# Altium PCB 175-00023, rev3, PCB, Sinistro Pwr Supply.PcbDoc (part 2 of 2)
Units mil, origin at the board's own origin, x right, y up, seen from the top; angles counter-clockwise.
Board outline 8267.72 x 3937.01 mil, 5 copper layers (TopLayer (*.GTL), MidLayer1 (*.G1), AGND (*.GP1), GND (*.GP2), BottomLayer (*GBL)); 101 components, 68 nets, 420 pads, 79 vias.
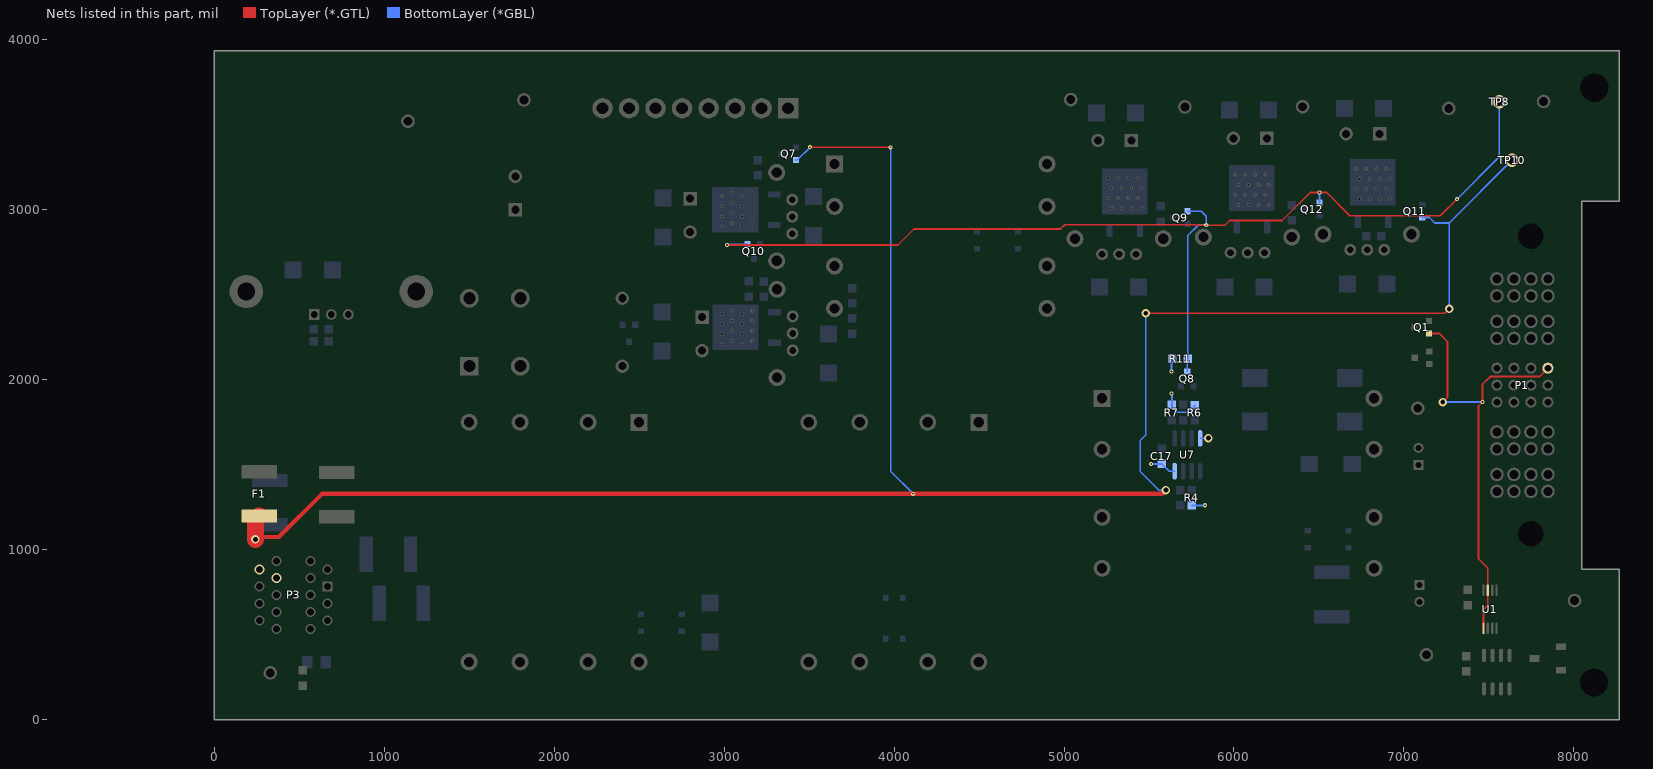
[diagram p5: the nets of this part, all layers, seen from the top]

## Via types
v1: diameter 50, hole 28, TopLayer (*.GTL) to BottomLayer (*GBL), 41 vias
v2: diameter 24, hole 10, TopLayer (*.GTL) to BottomLayer (*GBL), 38 vias

## Nets (pads, with @x,y where several pads share a name; then routed paths per layer and width w, separated by ;. In a path a pad name is that pad's centre, name@x,y a point inside that pad or via, vN(x,y) a via of type N, cw(c..) or ccw(c..) an arc to the next point about the centre after c; other vN are vias at no path point) (continued)
VCC: C17.2 F1.2 P3.5 P3.15 Q7.2 Q11.2 R4.1 R6.1 R7.2 R11.2 TP10.1 U7.4 U7.8 | length 13057.4
  TopLayer (*.GTL) w10: v2(3506,3369) 3979,3369 v2(3980,3368) ; v1(5481,2391) 7240,2391 v1(7266,2417)
  TopLayer (*.GTL) w25: v1(243,1061) 257,1075 379.92,1075 633.92,1329 v2(4112,1329) 5578,1329 v1(5600,1351)
  TopLayer (*.GTL) w100: v1(243,1061) 242,1061 242,1177.08 F1.2@264,1199.08
  BottomLayer (*GBL) w10: Q7.2@3423,3293 3430,3293 v2(3506,3369) ; v2(3980,3368) 3980,1461 v2(4112,1329) ; v1(5481,2391) 5481,1675 5449,1643 5449,1461 5559,1351 v1(5600,1351) ; v2(5513,1505) C17.2@5576,1505 5618.46,1462.54 U7.8@5651,1462.54 ; v2(5632,1919) 5635,1916 R7.2@5635,1852 5635,1841 5666,1810 5747,1810 5768,1831 R6.1@5768,1851 ; v2(5632,2049) 5632,2119.31 R11.2@5637.69,2125 ; R4.1@5752,1261 5828,1261 v2(5829,1262) ; U7.4@5801,1655.46 5848.46,1655.46 v1(5850,1657) ; Q11.2@7108,2955 7150,2955 7182,2923 7266,2923 ; v1(7266,2417) 7266,2923 ; TP10.1@7635,3292 7266,2923
~CS_SLOT: P1.9 Q1.1 U1.1 U1.7 | length 2628.4
  TopLayer (*.GTL) w10: Q1.1@7149.3,2273 7207.3,2273 7256,2224.3 7256,1896.7 v1@7230.3,1871 ; U1.1@7467.91,537.8 7467.91,647.61 7493.5,673.2 U1.7@7493.5,762.2 7493.5,892.8 7438.3,948 7438.3,1846.3 v2(7462,1870) 7462,1974 7507,2019 7797.35,2019 P1.9@7846.85,2068.5
  BottomLayer (*GBL) w10: v1(7228.3,1869) 7461,1869 v2(7462,1870)
~SPLY_DLY: Q8.3 Q9.1 Q10.1 Q12.1 R11.1 TP8.1 | length 6493.3
  TopLayer (*.GTL) w10: v2(3017,2793) 4023,2793 4117,2887 4978.89,2887 5004.89,2913 5776,2913 5778.89,2910.11 v2(5837,2910.11) 5947.11,2910.11 5974,2937 6283,2937 6448,3102 v2(6503,3102) 6545,3102 6682,2965 7214,2965 v2(7312,3063)
  BottomLayer (*GBL) w10: v2(3017,2793) 3022,2798 Q10.1@3138,2798 ; Q8.3@5725,2048 5725,2122.31 R11.1@5727.69,2125 5727.69,2848.69 5789.11,2910.11 v2(5837,2910.11) 5837,2963 5808,2992 Q9.1@5727.11,2992 ; Q12.1@6503,3042 v2(6503,3102) ; v2(7312,3063) 7561,3312 TP8.1@7561,3636
pads on no net: D3.2 P1.0 P1.1 P1.3 P1.4 P1.7 P1.8 U4.0 U5.0 U6.0 U7.5 U8.0 U9.0
copper on no net: | length 412.4
  TopLayer (*.GTL) w7: v2(6024.3,3733) v2@6028.35,3728.95
  BottomLayer (*GBL) w10: 6492,365 ccw(c6427.27,365) 6492,365

## Polygon pours and split planes (outlines as drawn)
VCC on AGND (*.GP1) (split plane): 5977.45,1202.55 5457.54,1202.55 5452.56,2472.45 5977.45,2472.45
NetF3_1 on AGND (*.GP1) (split plane): 3226.9,2839.57 3226.92,2839.47 3226.91,2839.36 3227.12,2838.5 3227.29,2837.62 3227.35,2837.53 3227.38,2837.43 3227.9,2836.71 3228.4,2835.97 3228.48,2835.91 3228.55,2835.82 3269.9,2797.76 3269.9,2770.1 891.93,2770.1 889.98,2769.71 888.32,2768.6 887.22,2766.95 886.83,2765 886.83,1267.1 555.1,1267.1 555.1,2994.9 2949.97,2994.9 2950.98,2995.1 2951.91,2995.29 2951.92,2995.29 2952.79,2995.87 2953.57,2996.39 2953.57,2996.4 2954.09,2997.17 2954.67,2998.05 2954.68,2998.05 2954.86,2998.99 2955.06,3000 2955.13,3143.01 2955.12,3143.05 3226.9,3144.87
NetF4_1 on AGND (*.GP1) (split plane): 3364.91,406.68 3363.65,405.04 3362.65,402.61 3362.3,400 3362.3,210.09 1056.74,210.09 1054.13,209.74 1051.7,208.74 1049.61,207.13 1048.01,205.04 1047,202.61 1046.65,200 1046.65,110.09 600.27,110.09 609.82,464.91 3079.86,464.91 3079.87,464.91 3081.1,465.08 3082.47,465.26 3082.48,465.26 3083.65,465.74 3084.91,466.26 3084.91,466.27 3086,467.11 3087,467.87 3087.8,468.92 3088.6,469.96 3089.1,471.16 3089.61,472.39 3089.77,473.66 3089.95,475 3089.84,734.34 3089.83,734.39 3089.84,734.44 3075.77,2000.11 3075.59,2001.36 3075.43,2002.61 3075.41,2002.66 3075.4,2002.72 3074.9,2003.88 3074.42,2005.04 3074.39,2005.09 3074.36,2005.14 3073.58,2006.13 3072.82,2007.13 3072.77,2007.17 3072.74,2007.21 3071.73,2007.96 3070.73,2008.73 3070.68,2008.76 3070.63,2008.79 3069.46,2009.26 3068.3,2009.74 3068.24,2009.75 3068.19,2009.77 3066.93,2009.92 3065.69,2010.09 2940.43,2010.09 2938.46,2489.91 3364.91,2489.91
NetF2_1 on AGND (*.GP1) (split plane): 5644.9,2924.67 5155.1,2924.67 5155.1,3175 5154.71,3176.95 5153.6,3178.6 5151.95,3179.71 5150,3180.1 425,3180.1 423.05,3179.71 421.4,3178.6 420.29,3176.95 419.9,3175 419.9,1267.1 130.1,1267.1 130.1,3319.9 5644.9,3319.9
A on AGND (*.GP1) (split plane): 8247.62,3071.28 8047.24,3071.28 8043.32,3070.89 8039.55,3069.75 8036.08,3067.89 8033.03,3065.39 8030.53,3062.35 8028.68,3058.87 8027.53,3055.1 8027.15,3051.18 8027.15,885.83 8027.53,881.91 8028.68,878.14 8030.53,874.66 8033.03,871.62 8036.08,869.12 8039.55,867.26 8043.32,866.12 8047.24,865.73 8247.62,865.73 8247.62,20.1 20.1,20.1 20.1,3916.91 8247.62,3916.91
NetFER3_1 on GND (*.GP2) (split plane): 6389.91,1790 6389.92,1789.94 6389.91,1789.88 6390.09,1788.63 6390.26,1787.39 6390.28,1787.33 6390.29,1787.27 6390.78,1786.12 6391.26,1784.96 6391.3,1784.91 6391.33,1784.85 6392.1,1783.86 6392.87,1782.87 6392.92,1782.83 6392.95,1782.78 6393.96,1782.03 6394.96,1781.27 6395.01,1781.24 6395.06,1781.2 6396.23,1780.74 6397.39,1780.26 6397.45,1780.25 6397.51,1780.23 6398.76,1780.08 6400,1779.91 6400.06,1779.92 6400.12,1779.91 7228.36,1789.91 8027.15,1789.91 8027.15,1270.8 7435.09,1260.27 7435.09,1575 7434.74,1577.61 7433.74,1580.04 7432.13,1582.13 7430.04,1583.73 7427.61,1584.74 7425,1585.09 5860.09,1585.09 5860.09,1880.91 6389.91,1880.91
NetFER3_2 on GND (*.GP2) (split plane): 8027.15,2660.12 8027.15,1810.09 7228.3,1810.09 7228.24,1810.08 7228.18,1810.09 6410.09,1800.21 6410.09,1891 6409.74,1893.61 6408.74,1896.04 6407.13,1898.13 6405.04,1899.73 6402.61,1900.74 6400,1901.09 5859.99,1901.09 5857.57,2149.91 7450,2149.91 7452.61,2150.26 7455.04,2151.27 7457.13,2152.87 7458.74,2154.96 7459.74,2157.39 7460.09,2160 7460.09,2669.74
NetF6_1 on GND (*.GP2) (split plane): 7139.91,2383.09 5377.45,2383.09 5374.84,2382.74 5372.41,2381.73 5370.32,2380.13 5368.71,2378.04 5367.71,2375.61 5367.36,2373 5367.36,510.09 1116.54,510.83 1121.34,838.88 1393.79,837.45 1441.01,744.43 1441.16,744.21 1441.27,743.95 1441.9,743.12 1442.49,742.26 1442.7,742.08 1442.87,741.87 1443.7,741.23 1444.49,740.55 1444.74,740.43 1444.96,740.26 1445.93,739.86 1446.87,739.41 1447.14,739.36 1447.39,739.26 1448.43,739.12 1449.46,738.93 1449.73,738.95 1450,738.91 5125,739.91 5126.29,740.08 5127.59,740.25 5127.6,740.26 5127.61,740.26 5128.81,740.75 5130.03,741.25 5130.03,741.26 5130.05,741.27 5131.09,742.07 5132.12,742.85 5132.12,742.86 5132.13,742.87 5132.92,743.9 5133.72,744.94 5133.73,744.95 5133.74,744.96 5134.22,746.13 5134.74,747.37 5134.74,747.38 5134.74,747.39 5134.91,748.67 5135.09,749.98 5138.84,2628.55 6499.94,2624.86 6500.02,2624.87 6500.1,2624.86 6501.33,2625.04 6502.56,2625.2 6502.63,2625.23 6502.7,2625.24 6503.85,2625.73 6504.99,2626.2 6505.05,2626.24 6505.12,2626.27 6506.1,2627.04 6507.08,2627.79 6507.13,2627.86 6507.19,2627.9 6507.93,2628.9 6508.69,2629.88 6508.72,2629.95 6508.77,2630.01 6509.23,2631.17 6509.71,2632.31 6509.72,2632.39 6509.75,2632.46 6509.89,2633.69 6510.06,2634.92 6510.05,2634.99 6510.06,2635.07 6501.42,3333.32 6502.7,3334.06 7139.91,3334.06
NetF5_1 on GND (*.GP2) (split plane): 6482,3342.87 6481.52,3341.71 6481.51,3341.65 6481.49,3341.59 6481.34,3340.35 6481.18,3339.1 6481.19,3339.04 6481.18,3338.97 6489.76,2645.06 5128.8,2648.75 5127.48,2648.58 5126.19,2648.42 5126.19,2648.41 5125,2647.93 5123.76,2647.42 5123.75,2647.41 5122.73,2646.63 5121.66,2645.82 5121.66,2645.81 5120.84,2644.75 5120.06,2643.73 5120.05,2643.73 5119.54,2642.49 5119.04,2641.3 5118.86,2639.99 5118.69,2638.69 5114.93,760.08 1456.19,759.09 1408.99,852.07 1408.85,852.27 1408.76,852.5 1408.11,853.35 1407.51,854.24 1407.32,854.4 1407.17,854.59 1406.32,855.25 1405.51,855.95 1405.28,856.06 1405.09,856.21 1404.1,856.62 1403.13,857.09 1402.89,857.13 1402.66,857.23 1401.6,857.37 1400.54,857.57 1400.3,857.55 1400.05,857.59 1121.49,859.05 1121.53,1102.11 4825,1102.11 4827.61,1102.45 4830.04,1103.46 4832.13,1105.06 4833.74,1107.15 4834.74,1109.59 4835.09,1112.2 4835.09,2815.91 5925,2815.91 5927.61,2816.26 5930.04,2817.27 5932.13,2818.87 5933.74,2820.96 5934.74,2823.39 5935.09,2826 5935.09,3342.81 6482.36,3343.77
NetC21_1 on GND (*.GP2) (split plane): 1885.75,2271.93 849.93,2254.01 848.4,2253.68 847.11,2252.79 846.96,2252.55 753.01,2252.55 753.01,2537.45 843.44,2537.45 843.74,2535.91 844.61,2534.61 845.91,2533.74 847.45,2533.44 1675.11,2533.44 1676.64,2533.74 1677.94,2534.61 1678.81,2535.91 1679.12,2537.45 1679.12,3104.3 1885.75,3104.3
NetC23_pos on GND (*.GP2) (split plane): 744.99,2252.55 356.3,2252.55 355.32,2252.36 354.5,2251.8 353.94,2250.98 353.75,2250 353.75,1319.08 174.43,1318.11 184.15,2537.45 744.99,2537.45
GND on GND (*.GP2) (split plane): 8247.62,3071.28 8047.24,3071.28 8043.32,3070.89 8039.55,3069.75 8036.08,3067.89 8033.03,3065.39 8030.53,3062.35 8028.68,3058.87 8027.53,3055.1 8027.15,3051.18 8027.15,2680.3 7450.17,2690.08 7450.09,2690.07 7450,2690.09 7448.78,2689.93 7447.56,2689.79 7447.47,2689.75 7447.39,2689.74 7446.25,2689.27 7445.11,2688.82 7445.04,2688.77 7444.96,2688.73 7443.98,2687.98 7442.99,2687.25 7442.94,2687.18 7442.87,2687.13 7442.12,2686.15 7441.35,2685.19 7441.32,2685.11 7441.26,2685.04 7440.79,2683.9 7440.3,2682.78 7440.29,2682.69 7440.26,2682.61 7440.1,2681.39 7439.92,2680.17 7439.92,2680.09 7439.91,2680 7439.91,2170.09 5847.39,2170.09 5847.34,2170.08 5847.29,2170.09 5846.04,2169.91 5844.78,2169.74 5844.73,2169.72 5844.68,2169.72 5843.52,2169.22 5842.35,2168.73 5842.31,2168.7 5842.26,2168.69 5841.26,2167.9 5840.26,2167.13 5840.23,2167.09 5840.19,2167.06 5839.42,2166.05 5838.65,2165.04 5838.64,2165 5838.61,2164.96 5838.13,2163.78 5837.65,2162.61 5837.64,2162.56 5837.62,2162.52 5837.47,2161.26 5837.3,2160 5837.31,2159.95 5837.3,2159.9 5839.91,1890.95 5839.91,1575 5840.26,1572.39 5841.26,1569.96 5842.87,1567.87 5844.96,1566.27 5847.39,1565.26 5850,1564.91 7414.91,1564.91 7414.91,1250 7414.93,1249.91 7414.92,1249.82 7415.1,1248.61 7415.26,1247.39 7415.29,1247.31 7415.31,1247.22 7415.79,1246.09 7416.26,1244.96 7416.32,1244.89 7416.36,1244.8 7417.12,1243.84 7417.87,1242.87 7417.94,1242.81 7418,1242.74 7418.98,1242.01 7419.96,1241.27 7420.04,1241.23 7420.11,1241.18 7421.25,1240.73 7422.39,1240.26 7422.48,1240.25 7422.56,1240.21 7423.78,1240.07 7425,1239.91 7425.09,1239.93 7425.18,1239.92 8027.15,1250.62 8027.15,885.83 8027.53,881.91 8028.68,878.14 8030.53,874.66 8033.03,871.62 8036.08,869.12 8039.55,867.26 8043.32,866.12 8047.24,865.73 8247.62,865.73 8247.62,20.1 20.1,20.1 20.1,3916.91 8247.62,3916.91
VCC on GND (*.GP2) (split plane): 353.75,1095.06 353.67,1095.01 353.11,1094.19 352.9,1093.21 350.79,912.32 350.79,912.31 350.79,912.29 350.88,911.82 350.97,911.34 350.98,911.33 350.98,911.32 351.25,910.91 351.51,910.51 351.53,910.5 351.53,910.49 379.5,882.53 380.32,881.98 381.3,881.78 463.75,881.78 463.75,786.88 338,786.88 288.75,836.13 287.92,836.69 286.94,836.88 168.85,836.88 168.85,934.24 169.8,934.42 170.64,934.96 171.2,935.79 171.4,936.76 174.35,1307.92 353.75,1308.89

## Keep-outs
KeepOutLayer:
  lines w8: -144.7,3790.26 8055.3,3790.26 ; -142.7,119 -142.7,319 -317.7,319 -317.7,3619 -142.7,3619 -142.7,3819 ; -141.7,107.74 7277.31,107.74 ; 8057.3,119 8057.3,319 8207.3,319 8207.3,3619 8057.3,3619 8057.3,3819

## Other copper
TopLayer (*.GTL):
  text "*.GTL - TOP LAYER GERBER DATA" at 2321.87,-1210.43 h80
MidLayer1 (*.G1):
  text "*.G1 --  MID LAYER GERBER DATA" at 2389,-1220 h80
BottomLayer (*GBL):
  text "c" at 6448,352 h60
  text "2013, Las Cumbres Observatory" at 6320,331 h60
  text "175-00023, Rev3, SINISTRO PWR SUPPLY" at 6443,182 h60
  text "*.GBL - BOTTOM LAYER GERBER DATA" at 2321.87,-1210.43 h80
AGND (*.GP1) (plane layer: these items are gaps in the copper):
  lines w5: 5450,2475 5980,2475 5980,1200 5455,1200 5450,2475
  lines w10: 2950,3148.11 3232,3150 3232,2839.57 3275,2800 3275,2765 2700,2765 891.93,2765 891.93,1262 550,1262 550,3000 700,3000 2750,3000 2949.97,3000 2950.03,3143.01 ; 125,1262 425,1262 425,3175 5150,3175 5150,2919.57 5650,2919.57 5650,3325 125,3325 125,1262
  lines w20: 781.74,475 600,475 ; 3372.39,400 3372.39,200 1056.74,200 1056.74,100 589.91,100 600,475 ; 3375,400 3375,2500 2928.33,2500 2930.39,2000 3065.69,2000 3079.75,734.33 3079.86,475 600,475
  text "*.GP1 - INTERNAL PLANE LAYER 1 GERBER DATA" at 2321.87,-1210.43 h80
GND (*.GP2) (plane layer: these items are gaps in the copper):
  lines w5: 166.3,939.33 166.3,834.33 286.94,834.33 336.94,784.33 466.3,784.33 466.3,884.33 381.3,884.33 353.34,912.29 355.45,1093.18 ; 168.85,936.78 181.62,2540 850,2540 ; 356.3,1093.5 356.3,2250 850,2250 ; 7959.69,1287 7960.3,1286.4
  lines w7.87: 749,2250 749,2540 ; 847.45,2537.45 1675.11,2537.45 1675.11,3108.32 1889.76,3108.32 1889.76,2267.99 850,2250
  lines w10: 171.84,1313 356.3,1314
  lines w20: 1106.3,500 1111.4,849.02 ; 1110.65,500.75 5377.45,500 5377.45,2373 7150,2373 7150,3344.14 6500,3344.14 6491.26,3339.1 6499.97,2634.95 5128.78,2638.67 5125,750 1450,749 1400,847.5 1111.4,849.02 ; 6497.39,3353.88 5925,3352.88 5925,2826 4825,2826 4825,1112.2 4750,1112.2 1111.45,1112.2 1111.4,849.02 ; 8036.08,1800 7228.3,1800 6400,1790 6400,1891 5850,1891 ; 8039.55,2670 7450,2680 7450,2160 5847.39,2160 5850,1891 ; 8043.32,1261 7425,1250 7425,1575 5850,1575 5850,1891
  text "*.GP2 - INTERNAL PLANE LAYER 2 GERBER DATA" at 2317.91,-1230.32 h80

## Silkscreen, mask and mechanical layers (free items; w line width, h text height)
TopOverlay:
  rectangle: 1429,3580 1686,3764
  rectangle: 2257,-354 2300,-346
  lines w10: -593.7,0 -593.7,3937.01 -493.7,3937.01 -493.7,0 -593.7,0
  lines w11.81: 1525,3000 1715,3000 ; 1525,3200 1715,3200 ; 15,2855 1525,2855 1525,3100 1525,3345 15,3345 15,2855
  lines w19.68: 434,2269.68 0,2269.68 0,2769.68 1377.95,2769.68 1377.95,2269.68 944,2269.68
  text "780-00028" at 135.13,3744.53 h40
  text "-5V" at 1822,3734 h40
  text "+28V" at 4979,3725 h40
  text "AGND" at 7746,3712 h40
  text "FS12-500  (+/-5V)" at 3956,3703 h60
  text "+5V" at 5643,3668 h40
  text "-12V" at 7193,3667 h40
  text "+12V" at 6282,3666 h40
  text "SCH, SINISTRO POWER SUPPLY  REV:" at 153.83,3649.06 h40
  text "AGND" at 901,3499 h40
  text "VCC" at 7596,3366 h40
  text "A" at 7190,1584 h40
  text "GND" at 7184,1480 h40
  text "GND" at 7168,774 h40
  text "+24V" at 7946,769 h40
  text "24RTN" at 7154,673 h40
  text "AGND" at 7068,442 h40
  text "AGND" at 275,355 h40
  text "PGM" at 7862.2,192.91 h40
  text "FS24-800 (+/- 12V)" at 5413,171 h60
  text "FS12-1000  (Vcc)" at 1575,167 h60
  text "FS24-500  (+28V)" at 3482,167 h60
  text "*.GTO - TOP OVERLAY GERBER DATA" at 2321.87,-1210.43 h80
BottomOverlay:
  text "*GBO - BOTTOM OVERLAY GERBER DATA" at 2321.87,-1210.43 h80
TopPaste:
  text "*.GTP - TOP-SIDE SOLDER PASTE MASK" at 2321.86,-1210.43 h80
BottomPaste:
  text "*.GBP - BOTTOM-SIDE SOLDER PASTE MASK" at 2321.86,-1210.43 h80
TopSolder:
  text "*.GTS - TOP SOLDER MASK GERBER DATA" at 2321.87,-1210.43 h80
BottomSolder:
  rectangle: 4590,141 6502,452
  rectangle: 4286,143 4618,263
  text "*.GBS - BOTTOM SOLDER MASK GERBER DATA" at 2321.87,-1210.43 h80
Mechanical1:
  lines w39.37: 0,0 8267.72,0 8267.72,885.83 8047.24,885.83 8047.24,3051.18 8267.72,3051.18 8267.72,3937.01 0,3937.01 0,3346.46 0,629.92 0,0
Mechanical2:
  lines w10: -11591.27,-8447.2 9408.73,-8447.2 9408.73,7552.8 -11591.27,7552.8 -11591.27,-8447.2 ; 5353.73,-8341.2 ccw(c5403.73,-8341.2) 5403.73,-8391.2 5733.73,-8391.2 ccw(c5733.73,-8351.2) 5773.73,-8351.2 5773.73,-8181.2 ccw(c5733.73,-8181.2) 5733.73,-8141.2 5353.73,-8141.2 5353.73,-8341.2 ; 5353.73,-8051.2 ccw(c5403.73,-8051.2) 5403.73,-8101.2 9303.73,-8101.2 ccw(c9303.73,-8051.2) 9353.73,-8051.2 9353.73,-7861.2 ccw(c9303.73,-7861.2) 9303.73,-7811.2 5353.73,-7811.2 5353.73,-8051.2 ; 5353.73,-7721.2 ccw(c5403.73,-7721.2) 5403.73,-7771.2 7283.73,-7771.2 ccw(c7283.73,-7721.2) 7333.73,-7721.2 7333.73,-7571.2 ccw(c7283.73,-7571.2) 7283.73,-7521.2 5353.73,-7521.2 5353.73,-7721.2 ; 5353.73,-7441.2 ccw(c5393.73,-7441.2) 5393.73,-7481.2 6203.73,-7481.2 ccw(c6203.73,-7431.2) 6253.73,-7431.2 6253.73,-7281.2 ccw(c6203.73,-7281.2) 6203.73,-7231.2 5353.73,-7231.2 5353.73,-7441.2 ; 5813.73,-8351.2 ccw(c5853.73,-8351.2) 5853.73,-8391.2 7813.73,-8391.2 ccw(c7813.73,-8351.2) 7853.73,-8351.2 7853.73,-8181.2 ccw(c7813.73,-8181.2) 7813.73,-8141.2 5813.73,-8141.2 5813.73,-8351.2 ; 6293.73,-7431.2 ccw(c6343.73,-7431.2) 6343.73,-7481.2 7283.73,-7481.2 ccw(c7283.73,-7431.2) 7333.73,-7431.2 7333.73,-7281.2 ccw(c7283.73,-7281.2) 7283.73,-7231.2 6293.73,-7231.2 6293.73,-7431.2 ; 7373.73,-7721.2 ccw(c7423.73,-7721.2) 7423.73,-7771.2 9303.73,-7771.2 ccw(c9303.73,-7721.2) 9353.73,-7721.2 9353.73,-7571.2 ccw(c9303.73,-7571.2) 9303.73,-7521.2 7373.73,-7521.2 7373.73,-7721.2 ; 7373.73,-7431.2 ccw(c7423.73,-7431.2) 7423.73,-7481.2 8363.73,-7481.2 ccw(c8363.73,-7431.2) 8413.73,-7431.2 8413.73,-7281.2 ccw(c8363.73,-7281.2) 8363.73,-7231.2 7373.73,-7231.2 7373.73,-7431.2 ; 7893.73,-8341.2 ccw(c7943.73,-8341.2) 7943.73,-8391.2 8273.73,-8391.2 ccw(c8273.73,-8351.2) 8313.73,-8351.2 8313.73,-8181.2 ccw(c8273.73,-8181.2) 8273.73,-8141.2 7893.73,-8141.2 7893.73,-8341.2 ; 8353.73,-8351.2 ccw(c8393.73,-8351.2) 8393.73,-8391.2 9303.73,-8391.2 ccw(c9303.73,-8341.2) 9353.73,-8341.2 9353.73,-8191.2 ccw(c9303.73,-8191.2) 9303.73,-8141.2 8353.73,-8141.2 8353.73,-8351.2 ; 8453.73,-7431.2 ccw(c8503.73,-7431.2) 8503.73,-7481.2 9303.73,-7481.2 ccw(c9303.73,-7431.2) 9353.73,-7431.2 9353.73,-7281.2 ccw(c9303.73,-7281.2) 9303.73,-7231.2 8453.73,-7231.2 8453.73,-7431.2
  lines w17: -11187.05,-4047.46 -5889.72,-4047.46 ; -11187.05,-3743.46 -5889.72,-3743.46 ; -11247.05,-6405.94 ccw(c-11149.05,-6405.94) -11149.05,-6503.94 -5927.72,-6503.94 ccw(c-5927.72,-6405.94) -5829.72,-6405.94 -5829.72,-3174.77 ccw(c-5927.72,-3174.77) -5927.72,-3076.77 -11149.05,-3076.77 ccw(c-11149.05,-3174.77) -11247.05,-3174.77 -11247.05,-6405.94
  lines w20: -11571.2,-7801.33 cw(c-11521.27,-7876.2) -11521.27,-7786.2 -11061.27,-7786.2 cw(c-11061.27,-7876.2) -10971.27,-7876.2 -10971.27,-7926.2 ccw(c-10961.27,-7926.2) -10961.27,-7936.2 -8321.27,-7936.2 cw(c-8321.27,-8026.2) -8231.27,-8026.2 -8231.27,-8366.2 cw(c-8321.27,-8366.2) -8246.39,-8416.14 ; 5309.9,-8431.18 cw(c5403.73,-8341.2) 5273.73,-8341.2 5273.73,-6671.2 cw(c5403.73,-6671.2) 5403.73,-6541.2 9303.73,-6541.2 cw(c9303.73,-6671.2) 9392.39,-6576.13 ; -11571.27,-8366.2 ccw(c-11521.27,-8366.2) -11521.27,-8416.2 -8321.27,-8416.2 ccw(c-8321.27,-8366.2) -8271.27,-8366.2 -8271.27,-8026.2 ccw(c-8321.27,-8026.2) -8321.27,-7976.2 -10961.27,-7976.2 cw(c-10961.27,-7926.2) -11011.27,-7926.2 -11011.27,-7876.2 ccw(c-11061.27,-7876.2) -11061.27,-7826.2 -11521.27,-7826.2 ccw(c-11521.27,-7876.2) -11571.27,-7876.2 -11571.27,-8366.2 ; -4061.27,-8267.2 ccw(c-3931.27,-8267.2) -3931.27,-8397.2 808.73,-8397.2 ccw(c808.73,-8267.2) 938.73,-8267.2 938.73,-6677.2 ccw(c808.73,-6677.2) 808.73,-6547.2 -3931.27,-6547.2 ccw(c-3931.27,-6677.2) -4061.27,-6677.2 -4061.27,-8267.2 ; 5313.73,-8341.2 ccw(c5403.73,-8341.2) 5403.73,-8431.2 9303.73,-8431.2 ccw(c9303.73,-8341.2) 9393.73,-8341.2 9393.73,-6671.2 ccw(c9303.73,-6671.2) 9303.73,-6581.2 5403.73,-6581.2 ccw(c5403.73,-6671.2) 5313.73,-6671.2 5313.73,-8341.2
  lines w24: -1511.27,-8237.2 -1361.27,-8237.2 ; -1511.27,-7987.2 -1361.27,-7987.2 ; -1511.27,-7737.2 -1361.27,-7737.2 ; -1511.27,-7487.2 -1361.27,-7487.2 ; -1511.27,-7237.2 -1361.27,-7237.2
  lines w30: -12091.27,-8947.2 9908.73,-8947.2 9908.73,8052.8 -12091.27,8052.8 -12091.27,-8947.2
  lines w50: 5498.73,-7082.2 7148.73,-7082.2 ; 5498.73,-6702.2 7148.73,-6702.2 ; 7148.73,-7082.2 5488.73,-7082.2 5488.73,-6702.2 7148.73,-6702.2 ; 7148.73,-7082.2 7148.73,-6702.2
  text "NOTES (UNLESS OTHERWISE SPECIFIED):" at -11271.27,7028.8 h90
  text "GENERAL" at -11171.27,6828.8 h90
  text "1)" at -11071.27,6628.75 h75
  text "PCB IS 5-LAYER, .062\" THICK." at -10871.27,6628.76 h75
  text "2)" at -11071.27,6478.75 h75
  text "CONSTRUCTION IS SOLDER-MASK-OVER-BARE-COPPER (SMOBC)." at -10871.27,6478.75 h75
  text "3)" at -11071.27,6328.75 h75
  text "ACCEPTABILITY SHALL BE BASED ON IPC-A-600, CLASS 2." at -10871.27,6328.75 h75
  text "4)" at -11071.27,6178.75 h75
  text "THE FOLLOWING GERBER RS274X PHOTO TOOL FILES SHALL BE USED TO DEFINE ALL CIRCUIT FEATURES:" at -10871.27,6178.75 h75
  text "*.GTL - TOP LAYER GERBER DATA" at -10597.27,5967.79 h80
  text "*.G1 - MID LAYER 1 GERBER DATA" at -10597.27,5814.13 h80
  text "*.GP1 - INTERNAL PLANE LAYER 1 GERBER DATA" at -10597.27,5353.13 h80
  text "*.GP2 - INTERNAL PLANE LAYER 2 GERBER DATA" at -10597.27,5199.46 h80
  text "*.GBL - BOTTOM LAYER GERBER DATA" at -10597.27,4584.8 h80
  text "*.GTO - TOP OVERLAY GERBER DATA" at -10597.27,4431.13 h80
  text "*.GTS - TOP SOLDER MASK GERBER DATA" at -10597.27,4277.47 h80
  text "*.GTP - TOP-SIDE SOLDER PASTE MASK" at -10597.28,4123.79 h80
  text "*GBO - BOTTOM OVERLAY GERBER DATA" at -10597.27,3970.14 h80
  text "*.GBS - BOTTOM SOLDER MASK GERBER DATA" at -10597.27,3816.47 h80
  text "*.GBP - BOTTOM-SIDE SOLDER PASTE MASK" at -10597.28,3662.8 h80
  text "5)" at -11168.27,2947.03 h75
  text "THE PHOTO TOOL SHALL NOT BE COMPENSATED WITHOUT PRIOR ENGINEERING APPROVAL." at -10968.27,2947.03 h75
  text "PCB DESIGNER: RICH LOBDILL   PH (805) 880-1621  FAX (805) 961-1792." at -10968.27,2797.08 h75
  text "FABRICATION TOLERANCES" at -11113.27,2470.8 h90
  text "6)" at -11013.27,2270.75 h75
  text "END PRODUCT CONDUCTOR WIDTHS AND PAD DIAMETERS SHALL NOT VARY MORE THAN" at -10813.27,2270.75 h75
  text "0.002\" FROM THE 1:1 DIMENSIONS OF THE MASTER ARTWORK." at -10813.27,2120.8 h75
  text "7)" at -11013.27,1970.75 h75
  text "THE CONDUCTIVE PATTERN SHALL BE POSITIONED SO THAT THE LOCATION OF ANY PAD OR" at -10813.27,1970.75 h75
  text "LAND SHALL BE WITHIN 0.005\" DIAMETER TO THE TRUE POSITION OF THE HOLE IT CIRCUMSCRIBES." at -10813.27,1820.8 h75
  text "8)" at -11013.27,1670.75 h75
  text "ALL DRILL HOLE SIZES AND TOLERANCES APPLY AFTER PLATING." at -10813.27,1670.75 h75
  text "9)" at -11013.27,1520.75 h75
  text "THE MINIMUM ANNULAR RING SHALL BE 0.005\"." at -10813.27,1520.75 h75
  text "10)" at -11068.27,1370.75 h75
  text "BOW AND TWIST SHALL NOT EXCEED 0.010\" PER INCH." at -10813.27,1370.75 h75
  text "11)" at -11058.27,1220.75 h75
  text "FOR PCB ROUTING DIMENSIONS: .XXX = +/-.005\"  .XX = +/-.020\"" at -10813.27,1220.75 h75
  text "MATERIAL" at -11113.27,1020.8 h90
  text "12)" at -11068.27,820.75 h75
  text "BASE MATERIAL IS FR4 EPOXY FIBERGLASS" at -10806.27,814.8 h75
  text "SEE STACK-UP LEGEND FOR COPPER CLADDING CALL OUTS" at -10806.27,674.8 h75
  text "13)" at -11068.27,670.75 h75
  text "PLATING" at -11113.27,470.8 h90
  text "14)" at -11068.27,275.75 h75
  text "ALL HOLES AND CONDUCTIVE SURFACES SHALL BE PLATED WITH A MINIMUM OF 0.001\" COPPER." at -10813.27,275.75 h75
  text "15a)" at -11068.27,125.75 h75
  text "AFTER SOLDERMASK, ALL EXPOSED HOLES AND CONDUCTIVE SURFACES SHALL BE COATED" at -10813.27,125.75 h75
  text "WITH A GOLD IMMERSION PLATING TO PRESERVE SOLDERABILITY." at -10806.27,-25.2 h75
  text "15b)" at -11089.27,-186.25 h75
  text "COPPER THEVING ON LAYERS AS NEEDED" at -10807,-200 h75
  text "COATINGS" at -11117.27,-422.2 h90
  text "16)" at -11067.27,-617.25 h75
  text "THE SOLDERMASK SHALL BE BLACK LIQUID PHOTO-IMAGEABLE PER IPC-SM-840, TYPE-B, CLASS 2." at -10817.27,-617.25 h75
  text "17)" at -11072.27,-767.25 h75
  text "THE SOLDERMASK REGISTRATION ALLOWANCE IS 0.003\".  THERE SHALL BE NO SOLDERMASK ON" at -10817.27,-767.25 h75
  text "ANY SOLDER PAD OR LAND." at -10817.27,-917.25 h75
  text "MARKING" at -11117.27,-1117.2 h90
  text "18)" at -11072.27,-1312.25 h75
  text "THE LEGEND SHALL BE SCREEN-PRINTED USING PERMANENT YELLOW EPOXY INK." at -10817.27,-1312.25 h75
  text "19)" at -11072.27,-1462.25 h75
  text "THE SCREEN PRINTING REGISTRATION ALLOWANCE IS 0.007\".  THERE SHALL BE NO INK ON ANY" at -10817.27,-1462.25 h75
  text "SOLDER PAD OR LAND." at -10817.27,-1612.2 h75
  text "20)" at -11082.27,-1762.25 h75
  text "THE VENDOR CODE AND UL FLAMMABILITY RATING MAY BE ETCHED IN THE FOIL OR MARKED IN" at -10817.27,-1762.25 h75
  text "PERMANENT EPOXY INK (VENDOR'S OPTION)." at -10817.27,-1912.2 h75
  text "ELECTRICAL TESTING" at -11117.27,-2112.2 h90
  text "21)" at -11072.27,-2307.25 h75
  text "ALL BOARDS SHALL BE ELECTRICALLY TESTED TO THE SUPPLIED IPC-D-356A NET LIST" at -10817.27,-2307.25 h75
  text "FOR CONTINUITY, OPENS AND SHORTS." at -10817.27,-2457.2 h75
  text "Layer Stack Up Detail for: 175-00023, rev3, PCB, Sinistro Pwr Supply.PcbDoc" at -11187.05,-3457.62 h70
  text "Layer" at -11187.05,-3856.96 h70
  text "COPPER THICKNESS" at -8794.29,-3959.65 h100
  text "Name" at -11187.05,-3996.96 h70
  text "TopLayer (*.GTL)" at -11187.05,-4280.76 h98
  text "1/2 oz,  1 oz Finished" at -8927.22,-4303.09 h100
  text "MidLayer1 (*.G1)" at -11187.05,-4730.35 h98
  text "1 oz" at -8951.31,-4740.43 h100
  text "AGND (*.GP1)" at -11187.05,-5179.95 h98
  text "1 oz" at -8984.77,-5194.17 h100
  text "1 oz" at -8984.77,-5607.56 h100
  text "GND (*.GP2)" at -11187.05,-5629.54 h98
  text "BottomLayer (*GBL)" at -11187.05,-6079.14 h98
  text "1/2 oz,  1 oz Finished" at -9066.98,-6120.02 h100
  text "Las Cumbres Observatory, Inc." at 7318.73,-6722.2 h90
  text "Las Cumbres Observatory" at 5548.73,-6842.2 h150
  text "PRIMARY PCB SPECIFICATIONS" at -3614.27,-6857.2 h200
  text "6740 Cortona Dr." at 7758.73,-6876.2 h90
  text "Global Telescope Network" at 5708.73,-7002.2 h125
  text "Goleta, CA 93117" at 7708.73,-7026.2 h90
  text "(REFER TO COMPLETE SPEC LISTING AT LEFT FOR FURTHER DETAILS)" at -3961.27,-7062.2 h100
  text "www.lcogt.net" at 7848.73,-7172.2 h90
  text "DATE" at 5373.73,-7283 h32
  text "DESIGNED" at 6313.73,-7283 h32
  text "DRAWN" at 7393.73,-7283 h32
  text "SCALE" at 8473.73,-7283 h32
  text "NUMBER OF LAYERS" at -3861.27,-7312.2 h150
  text "5" at -311.27,-7312.22 h150
  text "Rich Lobdill" at 7698.73,-7382.2 h55
  text "Rich Lobdill" at 6573.73,-7387.2 h55
  text "1 : 1" at 8758.73,-7401.2 h90
  text "1/16/2013" at 5403.73,-7408.2 h90
  text "FINISHED THICKNESS" at -3861.27,-7562.2 h150
  text ".062\"" at -486.27,-7562.2 h150
  text "CHECKED/DATE" at 5373.73,-7573 h32
  text "APPROVED/DATE" at 7393.73,-7573 h32
  text "BASE MATERIAL" at -3861.27,-7812.2 h150
  text "FR4" at -561.27,-7812.2 h150
  text "TITLE" at 5373.73,-7863 h32
  text "NOTICE" at -11516.27,-7971.2 h100
  text "175-00023, SINISTRO POWER SUPPLY" at 5593.73,-8007.2 h100
  text "GOLD IMMERSION" at -1055.27,-8029.2 h150
  text "PLATING TYPE" at -3861.27,-8062.2 h150
  text "THIS DRAWING EMBODIES A PROPRIETARY DESIGN OWNED BY LAS CUMBRES" at -11481.27,-8086.2 h60
  text "OBSERVATORY.  IT IS SUBMITTED FOR A SPECIFIC PURPOSE UNDER A CON-" at -11481.27,-8186.2 h60
  text "SIZE" at 5373.73,-8193 h32
  text "DOC NO." at 5833.73,-8193 h32
  text "REV" at 7913.73,-8193 h32
  text "SHEET" at 8373.73,-8193 h32
  text "FIDENTIAL RELATIONSHIP, AND EXCEPT FOR PURPOSES EXPRESSLY GRANTED" at -11481.27,-8281.2 h60
  text "OF" at 8803.73,-8296.2 h60
  text "SOLDER MASK COLOR" at -3861.27,-8312.2 h150
  text "BLACK" at -436.27,-8312.2 h150
  text "1" at 8633.73,-8316.2 h100
  text "X" at 9033.73,-8316.2 h100
  text "3" at 8058.73,-8329.2 h130
  text "-" at 6388.73,-8331.2 h130
  text "GPT" at 7108.46,-8346 h130
  text "C" at 5508.73,-8347.2 h100
  text "IN WRITING, ALL RIGHTS ARE RESERVED BY LAS CUMBRES OBSERVATORY." at -11481.27,-8371.2 h60
Mechanical5:
  text "175-00023, Rev3, Sinistoro Power Supply" at 2342.9,-779.85 h80
  text "LAS CUMBRES OBSERVATORY   1/16/2013" at 2342.9,-929.87 h80
DrillDrawing:
  lines w10: -11591.27,-8447.2 9408.73,-8447.2 9408.73,7552.8 -11591.27,7552.8 -11591.27,-8447.2 ; 5353.73,-8341.2 ccw(c5403.73,-8341.2) 5403.73,-8391.2 5733.73,-8391.2 ccw(c5733.73,-8351.2) 5773.73,-8351.2 5773.73,-8181.2 ccw(c5733.73,-8181.2) 5733.73,-8141.2 5353.73,-8141.2 5353.73,-8341.2 ; 5353.73,-8051.2 ccw(c5403.73,-8051.2) 5403.73,-8101.2 9303.73,-8101.2 ccw(c9303.73,-8051.2) 9353.73,-8051.2 9353.73,-7861.2 ccw(c9303.73,-7861.2) 9303.73,-7811.2 5353.73,-7811.2 5353.73,-8051.2 ; 5353.73,-7731.2 ccw(c5393.73,-7731.2) 5393.73,-7771.2 6813.73,-7771.2 ccw(c6813.73,-7721.2) 6863.73,-7721.2 6863.73,-7571.2 ccw(c6813.73,-7571.2) 6813.73,-7521.2 5353.73,-7521.2 5353.73,-7731.2 ; 5813.73,-8351.2 ccw(c5853.73,-8351.2) 5853.73,-8391.2 7813.73,-8391.2 ccw(c7813.73,-8351.2) 7853.73,-8351.2 7853.73,-8181.2 ccw(c7813.73,-8181.2) 7813.73,-8141.2 5813.73,-8141.2 5813.73,-8351.2 ; 6903.73,-7721.2 ccw(c6953.73,-7721.2) 6953.73,-7771.2 8363.73,-7771.2 ccw(c8363.73,-7721.2) 8413.73,-7721.2 8413.73,-7571.2 ccw(c8363.73,-7571.2) 8363.73,-7521.2 6903.73,-7521.2 6903.73,-7721.2 ; 7893.73,-8341.2 ccw(c7943.73,-8341.2) 7943.73,-8391.2 8273.73,-8391.2 ccw(c8273.73,-8351.2) 8313.73,-8351.2 8313.73,-8181.2 ccw(c8273.73,-8181.2) 8273.73,-8141.2 7893.73,-8141.2 7893.73,-8341.2 ; 8353.73,-8351.2 ccw(c8393.73,-8351.2) 8393.73,-8391.2 9303.73,-8391.2 ccw(c9303.73,-8341.2) 9353.73,-8341.2 9353.73,-8191.2 ccw(c9303.73,-8191.2) 9303.73,-8141.2 8353.73,-8141.2 8353.73,-8351.2 ; 8453.73,-7721.2 ccw(c8503.73,-7721.2) 8503.73,-7771.2 9303.73,-7771.2 ccw(c9303.73,-7721.2) 9353.73,-7721.2 9353.73,-7571.2 ccw(c9303.73,-7571.2) 9303.73,-7521.2 8453.73,-7521.2 8453.73,-7721.2
  lines w20: -11566.2,-7816.33 cw(c-11516.27,-7891.2) -11516.27,-7801.2 -11056.27,-7801.2 cw(c-11056.27,-7891.2) -10966.27,-7891.2 -10966.27,-7941.2 ccw(c-10956.27,-7941.2) -10956.27,-7951.2 -8316.27,-7951.2 cw(c-8316.27,-8041.2) -8226.27,-8041.2 -8226.27,-8381.2 cw(c-8316.27,-8381.2) -8241.39,-8431.14 ; 5308.66,-8429.86 cw(c5403.73,-8341.2) 5273.73,-8341.2 5273.73,-7521.2 cw(c5353.73,-7521.2) 5353.73,-7441.2 9303.73,-7441.2 cw(c9303.73,-7571.2) 9392.39,-7476.13 ; -11566.27,-8381.2 ccw(c-11516.27,-8381.2) -11516.27,-8431.2 -8316.27,-8431.2 ccw(c-8316.27,-8381.2) -8266.27,-8381.2 -8266.27,-8041.2 ccw(c-8316.27,-8041.2) -8316.27,-7991.2 -10956.27,-7991.2 cw(c-10956.27,-7941.2) -11006.27,-7941.2 -11006.27,-7891.2 ccw(c-11056.27,-7891.2) -11056.27,-7841.2 -11516.27,-7841.2 ccw(c-11516.27,-7891.2) -11566.27,-7891.2 -11566.27,-8381.2 ; 5313.73,-8341.2 ccw(c5403.73,-8341.2) 5403.73,-8431.2 9303.73,-8431.2 ccw(c9303.73,-8341.2) 9393.73,-8341.2 9393.73,-7571.2 ccw(c9303.73,-7571.2) 9303.73,-7481.2 5353.73,-7481.2 ccw(c5353.73,-7521.2) 5313.73,-7521.2 5313.73,-8341.2
  lines w30: -12091.27,-8947.2 9908.73,-8947.2 9908.73,8052.8 -12091.27,8052.8 -12091.27,-8947.2
  text ".Legend" at -1117.27,-4330.2 h100
  text "DESIGNED" at 5373.73,-7573 h32
  text "DRAWN" at 6923.73,-7573 h32
  text "SCALE" at 8473.73,-7573 h32
  text "Rich Lobdill" at 5859.73,-7669.2 h55
  text "Rich Lobdill" at 7420.73,-7671.2 h55
  text "1 : 1" at 8758.73,-7691.2 h90
  text "TITLE" at 5373.73,-7863 h32
  text "NOTICE" at -11511.27,-7986.2 h100
  text "175-00023, SINISTRO POWER SUPPLY" at 5590.73,-8007.2 h100
  text "THIS DRAWING EMBODIES A PROPRIETARY DESIGN OWNED BY LAS CUMBRES" at -11476.27,-8101.2 h60
  text "SIZE" at 5373.73,-8193 h32
  text "DOC NO." at 5833.73,-8193 h32
  text "REV" at 7913.73,-8193 h32
  text "SHEET" at 8373.73,-8193 h32
  text "OBSERVATORY.  IT IS SUBMITTED FOR A SPECIFIC PURPOSE UNDER A CON-" at -11476.27,-8201.2 h60
  text "FIDENTIAL RELATIONSHIP, AND EXCEPT FOR PURPOSES EXPRESSLY GRANTED" at -11476.27,-8296.2 h60
  text "OF" at 8803.73,-8296.2 h60
  text "2" at 8618.73,-8316.2 h100
  text "X" at 9033.73,-8316.2 h100
  text "-" at 6388.73,-8331.2 h130
  text "3" at 8053.73,-8331.2 h130
  text "C" at 5508.73,-8347.2 h120
  text "GD1" at 7208.73,-8347.2 h120
  text "IN WRITING, ALL RIGHTS ARE RESERVED BY LAS CUMBRES OBSERVATORY." at -11476.27,-8386.2 h60

## Dimensions
0,3937.01 to 8267.72,3937.01 on Mechanical2
-22.05,-1.56 to -22.05,3935.45 on Mechanical2

## Text inside footprints (layer, text, board x,y; h text height)
P1: TopOverlay "15" at 7416.85,2273.5 h40; TopOverlay "14" at 7401.85,1628.5 h40; TopOverlay "12" at 7421.85,2043.5 h40; TopOverlay "4" at 7441.85,1848.5 h40; TopOverlay "16" at 7411.85,2523.5 h40; TopOverlay "13" at 7411.85,1378.5 h40; TopOverlay "PCB EDGE" at 8146.85,1718.5 h50 r90; TopOverlay "1" at 7916.85,1853.5 h40
U10: TopOverlay "1" at 579.13,2206.1 h59.06; TopOverlay "2" at 669.29,2206.1 h59.06; TopOverlay "3" at 769.29,2206.1 h59.06